# EAGLE board Li_Power_Boost_Converter-Panel-v12B (EAGLE 7.5.0), part 1 of 5
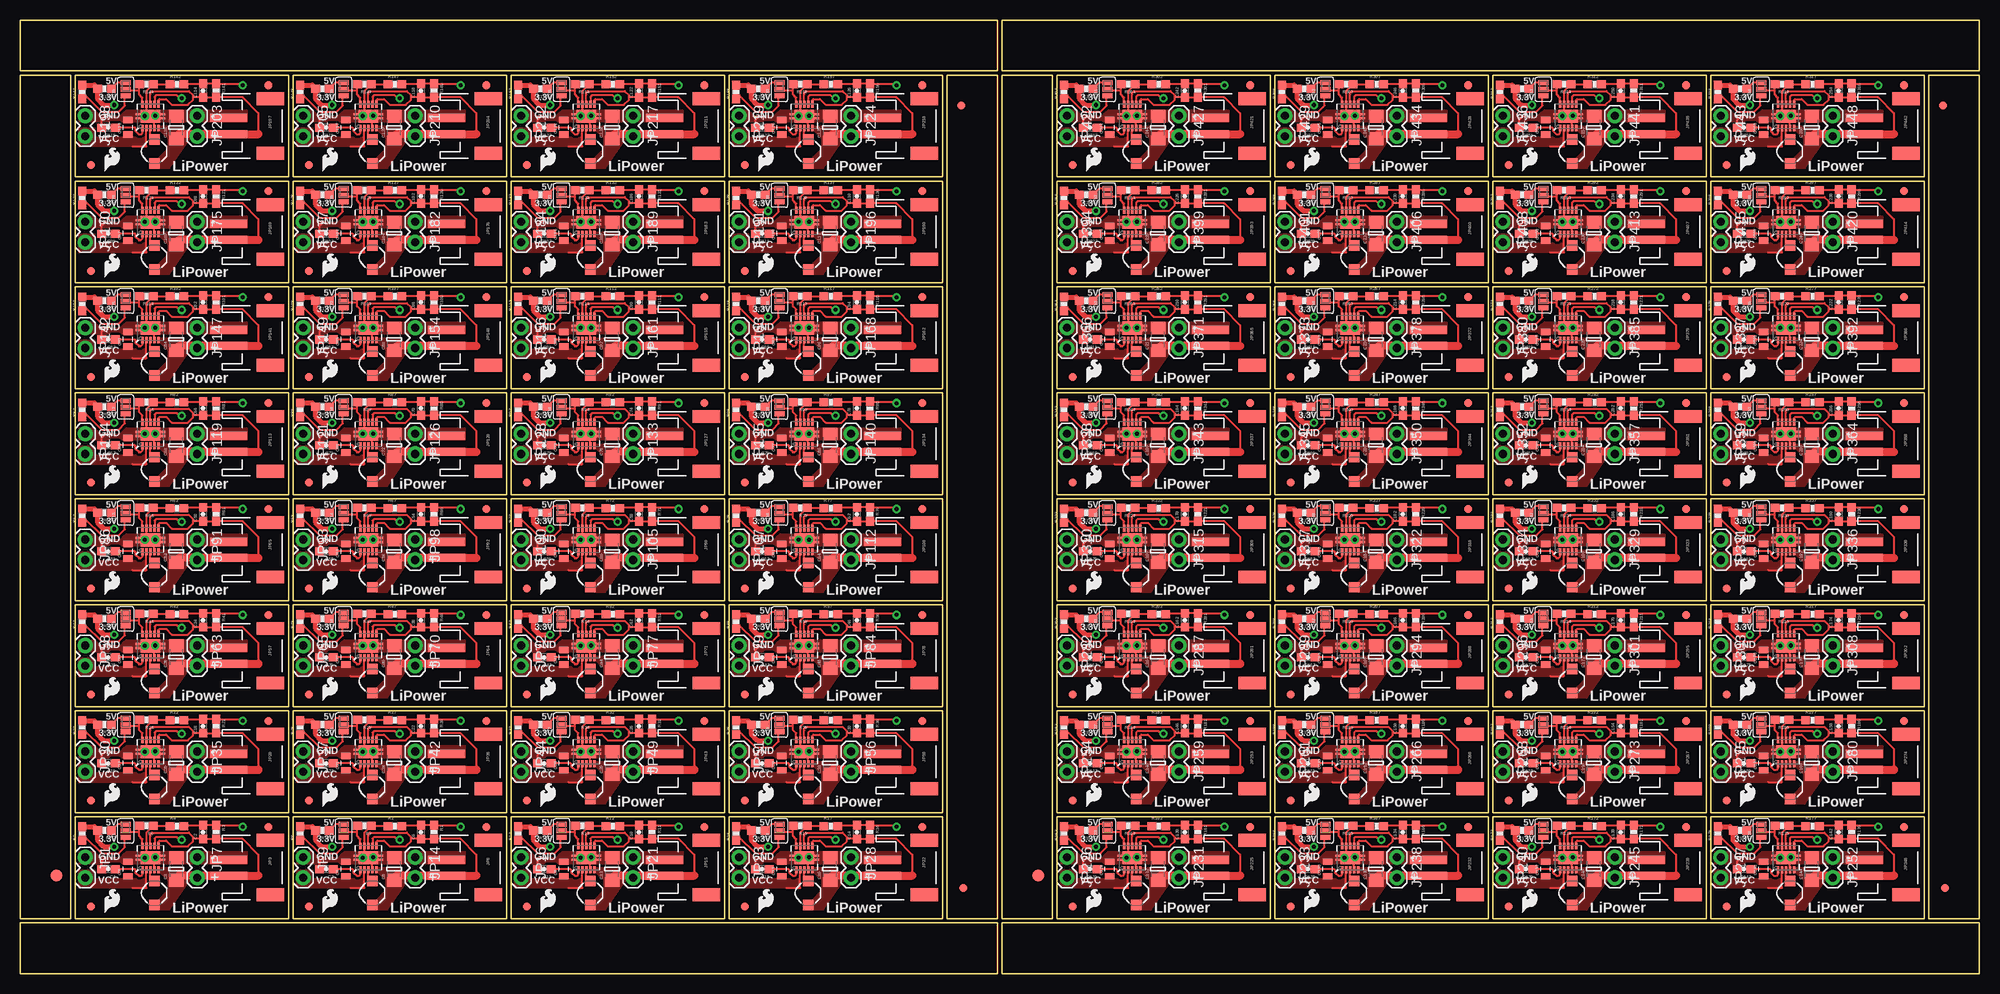
[diagram p0: board, top side]
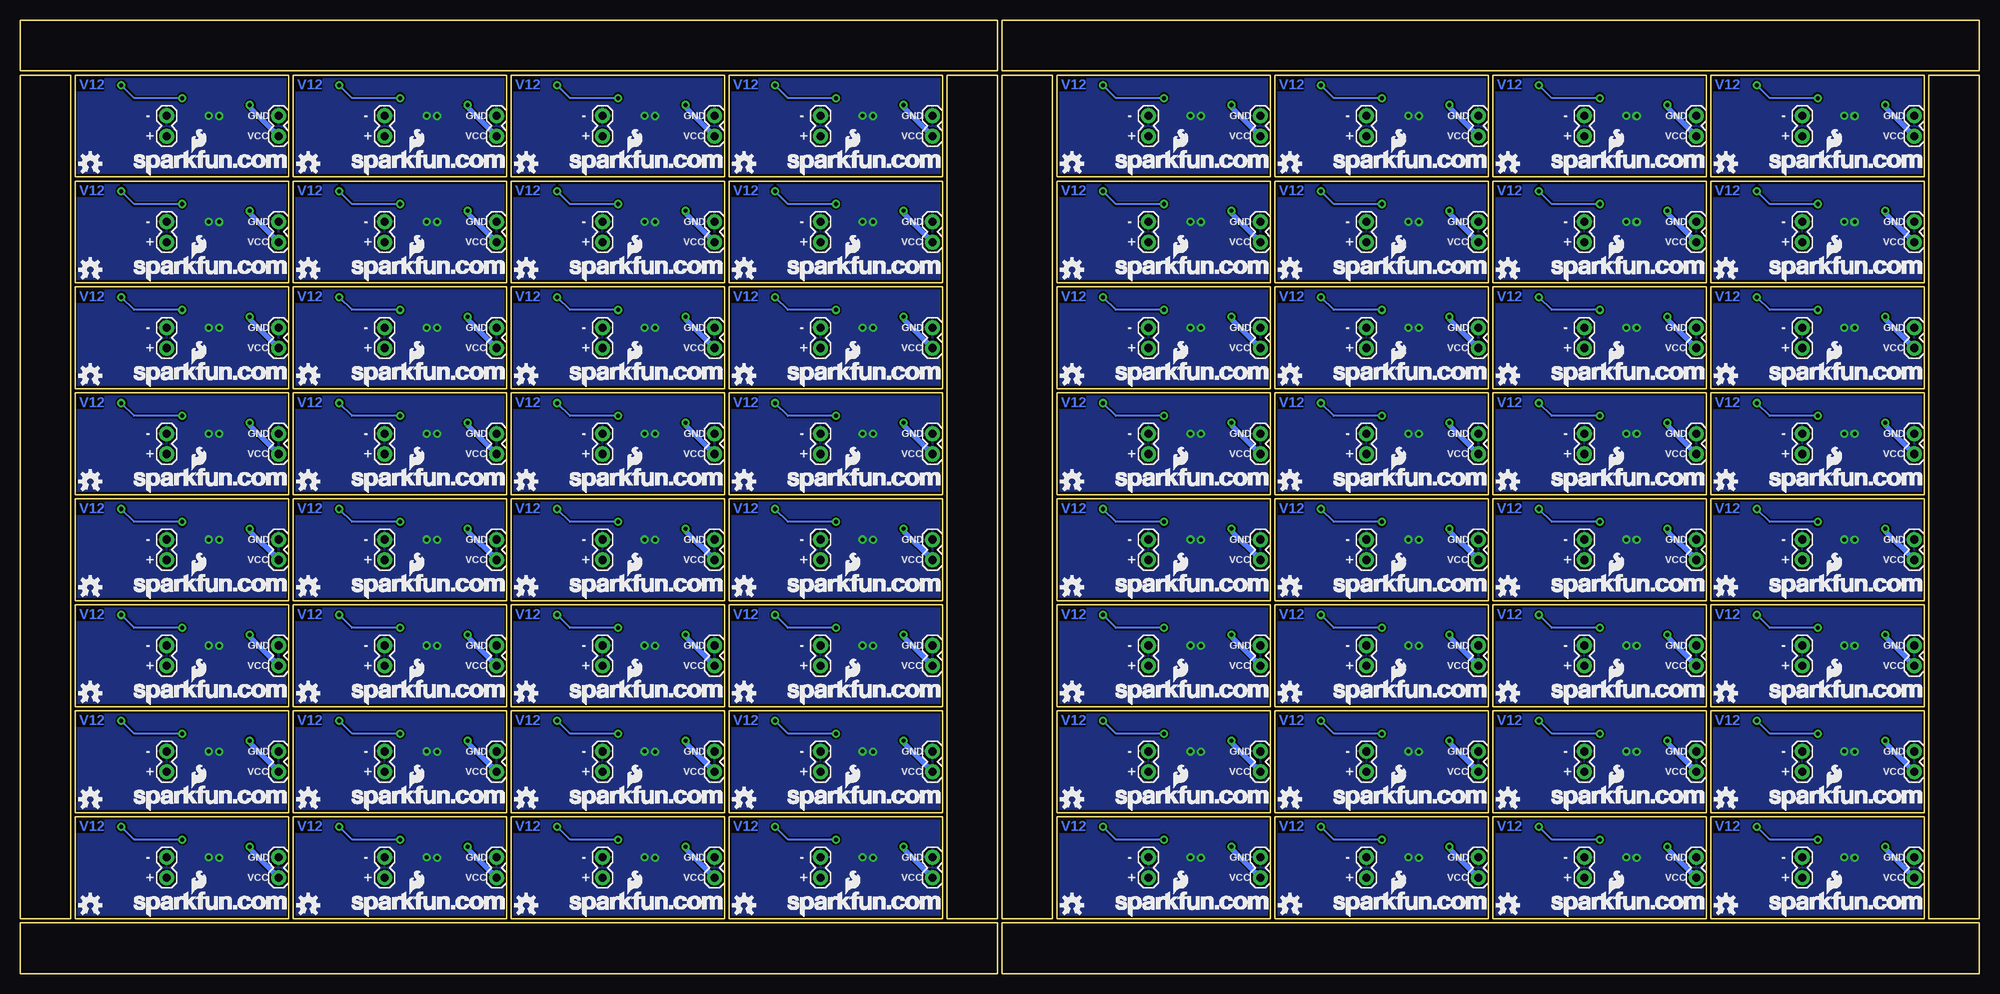
[diagram p1: board, bottom side, seen from below]

Size 244.35 x 118.87 mm. Coordinates in mm from the lower left corner, seen from the top.
Outline: 296 segments
Copper layers (1*16): Top 0.035mm / dielectric 1.5mm / Bottom 0.035mm
Design rules "SparkFun *": minimum track width 8mil, minimum drill 20mil, track to track 8mil, track to pad 8mil, pad to pad 8mil, via to via 8mil, smd to smd 8mil, copper to edge 8mil, drill to drill 8mil, minimum pad ring 12mil, minimum via ring 10mil, stop-mask expansion 4mil, vias tented up to drill 20mil, thermal gap 10mil

## Footprints (pad centres in the part's own frame; a part is rotated, then mirrored left to right if it is on the bottom)
1206 = smd 1.6 x 1.8: 1 -1.4,0; 2 1.4,0
0603-CAP = smd 1.1 x 1: 1 -0.85,0; 2 0.85,0
0805 = smd 0.8 x 1.2: 1 -0.9,0; 2 0.9,0
FIDUCIAL-1.5X3 = smd 1.5 x 1.5: 1 0,0
FIDUCIAL-1X2 = smd 1 x 1: 1 0,0
1X02 = drill 1.016 pad 1.88: 1 0,0; 2 2.54,0
JST-2-SMD = smd 1 x 4.6: 1 -1,-3.7; 2 1,-3.7 | smd 1.6 x 3.4: NC1 -3.4,1.5; NC2 3.4,1.5
CDRH2D09 = smd 1.3 x 1.3: P$1 -1.5,0; P$2 1.5,0
0603-RES = smd 1.1 x 1: 1 -0.85,0; 2 0.85,0
SJ_3_PASTE2&3 = smd 0.635 x 1.27: 1 -0.813,0; 2 0,0; 3 0.813,0
QFN-10_PAD = smd 0.297 x 0.85: 1 -1,-1.475; 2 -0.5,-1.475; 3 0,-1.475; 4 0.5,-1.475; 5 1,-1.475; 6 1,1.475; 7 0.5,1.475; 8 0,1.475; 9 -0.5,1.475; 10 -1,1.475 | smd 0.7 x 0.28: 11 -1.5,0.25; 12 -1.5,-0.25; 13 1.5,0.25; 14 1.5,-0.25 | smd 2.4 x 1.65: 15 0,0

## Placement (x,y rotation side)
C1  10uF  [1206]  19.48,13.03 90 top
C2  0.1uF  [0603-CAP]  22.83,17.63 90 top
C3  22uF  [0805]  13.46,13.03 90 top
C4  0.1uF  [0603-CAP]  11.02,13 180 top
C5  22uF  [0805]  40.64,13.03 90 top
C6  0.1uF  [0603-CAP]  50.01,17.63 90 top
C7  0.1uF  [0603-CAP]  38.2,13 180 top
C8  10uF  [1206]  46.66,13.03 90 top
C9  22uF  [0805]  67.82,13.03 90 top
C10  0.1uF  [0603-CAP]  77.19,17.63 90 top
C11  0.1uF  [0603-CAP]  65.38,13 180 top
C12  10uF  [1206]  73.84,13.03 90 top
C13  22uF  [0805]  95,13.03 90 top
C14  0.1uF  [0603-CAP]  104.37,17.63 90 top
C15  0.1uF  [0603-CAP]  92.56,13 180 top
C16  10uF  [1206]  101.02,13.03 90 top
C17  22uF  [0805]  13.46,26.24 90 top
C18  0.1uF  [0603-CAP]  22.83,30.84 90 top
C19  0.1uF  [0603-CAP]  11.02,26.21 180 top
C20  10uF  [1206]  19.48,26.24 90 top
C21  22uF  [0805]  40.64,26.24 90 top
C22  0.1uF  [0603-CAP]  50.01,30.84 90 top
C23  0.1uF  [0603-CAP]  38.2,26.21 180 top
C24  10uF  [1206]  46.66,26.24 90 top
C25  22uF  [0805]  67.82,26.24 90 top
C26  0.1uF  [0603-CAP]  77.19,30.84 90 top
C27  0.1uF  [0603-CAP]  65.38,26.21 180 top
C28  10uF  [1206]  73.84,26.24 90 top
C29  22uF  [0805]  95,26.24 90 top
C30  0.1uF  [0603-CAP]  104.37,30.84 90 top
C31  0.1uF  [0603-CAP]  92.56,26.21 180 top
C32  10uF  [1206]  101.02,26.24 90 top
C33  22uF  [0805]  13.46,39.45 90 top
C34  0.1uF  [0603-CAP]  22.83,44.04 90 top
C35  0.1uF  [0603-CAP]  11.02,39.42 180 top
C36  10uF  [1206]  19.48,39.45 90 top
C37  22uF  [0805]  40.64,39.45 90 top
C38  0.1uF  [0603-CAP]  50.01,44.04 90 top
C39  0.1uF  [0603-CAP]  38.2,39.42 180 top
C40  10uF  [1206]  46.66,39.45 90 top
C41  22uF  [0805]  67.82,39.45 90 top
C42  0.1uF  [0603-CAP]  77.19,44.04 90 top
C43  0.1uF  [0603-CAP]  65.38,39.42 180 top
C44  10uF  [1206]  73.84,39.45 90 top
C45  22uF  [0805]  95,39.45 90 top
C46  0.1uF  [0603-CAP]  104.37,44.04 90 top
C47  0.1uF  [0603-CAP]  92.56,39.42 180 top
C48  10uF  [1206]  101.02,39.45 90 top
C49  22uF  [0805]  13.46,52.65 90 top
C50  0.1uF  [0603-CAP]  22.83,57.25 90 top
C51  0.1uF  [0603-CAP]  11.02,52.63 180 top
C52  10uF  [1206]  19.48,52.65 90 top
C53  22uF  [0805]  40.64,52.65 90 top
C54  0.1uF  [0603-CAP]  50.01,57.25 90 top
C55  0.1uF  [0603-CAP]  38.2,52.63 180 top
C56  10uF  [1206]  46.66,52.65 90 top
C57  22uF  [0805]  67.82,52.65 90 top
C58  0.1uF  [0603-CAP]  77.19,57.25 90 top
C59  0.1uF  [0603-CAP]  65.38,52.63 180 top
C60  10uF  [1206]  73.84,52.65 90 top
C61  22uF  [0805]  95,52.65 90 top
C62  0.1uF  [0603-CAP]  104.37,57.25 90 top
C63  0.1uF  [0603-CAP]  92.56,52.63 180 top
C64  10uF  [1206]  101.02,52.65 90 top
C65  22uF  [0805]  13.46,65.86 90 top
C66  0.1uF  [0603-CAP]  22.83,70.46 90 top
C67  0.1uF  [0603-CAP]  11.02,65.84 180 top
C68  10uF  [1206]  19.48,65.86 90 top
C69  22uF  [0805]  40.64,65.86 90 top
C70  0.1uF  [0603-CAP]  50.01,70.46 90 top
C71  0.1uF  [0603-CAP]  38.2,65.84 180 top
C72  10uF  [1206]  46.66,65.86 90 top
C73  22uF  [0805]  67.82,65.86 90 top
C74  0.1uF  [0603-CAP]  77.19,70.46 90 top
C75  0.1uF  [0603-CAP]  65.38,65.84 180 top
C76  10uF  [1206]  73.84,65.86 90 top
C77  22uF  [0805]  95,65.86 90 top
C78  0.1uF  [0603-CAP]  104.37,70.46 90 top
C79  0.1uF  [0603-CAP]  92.56,65.84 180 top
C80  10uF  [1206]  101.02,65.86 90 top
C81  22uF  [0805]  13.46,79.07 90 top
C82  0.1uF  [0603-CAP]  22.83,83.67 90 top
C83  0.1uF  [0603-CAP]  11.02,79.04 180 top
C84  10uF  [1206]  19.48,79.07 90 top
C85  22uF  [0805]  40.64,79.07 90 top
C86  0.1uF  [0603-CAP]  50.01,83.67 90 top
C87  0.1uF  [0603-CAP]  38.2,79.04 180 top
C88  10uF  [1206]  46.66,79.07 90 top
C89  22uF  [0805]  67.82,79.07 90 top
C90  0.1uF  [0603-CAP]  77.19,83.67 90 top
C91  0.1uF  [0603-CAP]  65.38,79.04 180 top
C92  10uF  [1206]  73.84,79.07 90 top
C93  22uF  [0805]  95,79.07 90 top
C94  0.1uF  [0603-CAP]  104.37,83.67 90 top
C95  0.1uF  [0603-CAP]  92.56,79.04 180 top
C96  10uF  [1206]  101.02,79.07 90 top
C97  22uF  [0805]  13.46,92.28 90 top
C98  0.1uF  [0603-CAP]  22.83,96.88 90 top
C99  0.1uF  [0603-CAP]  11.02,92.25 180 top
C100  10uF  [1206]  19.48,92.28 90 top
C101  22uF  [0805]  40.64,92.28 90 top
C102  0.1uF  [0603-CAP]  50.01,96.88 90 top
C103  0.1uF  [0603-CAP]  38.2,92.25 180 top
C104  10uF  [1206]  46.66,92.28 90 top
C105  22uF  [0805]  67.82,92.28 90 top
C106  0.1uF  [0603-CAP]  77.19,96.88 90 top
C107  0.1uF  [0603-CAP]  65.38,92.25 180 top
C108  10uF  [1206]  73.84,92.28 90 top
C109  22uF  [0805]  95,92.28 90 top
C110  0.1uF  [0603-CAP]  104.37,96.88 90 top
C111  0.1uF  [0603-CAP]  92.56,92.25 180 top
C112  10uF  [1206]  101.02,92.28 90 top
C113  22uF  [0805]  13.46,105.49 90 top
C114  0.1uF  [0603-CAP]  22.83,110.08 90 top
C115  0.1uF  [0603-CAP]  11.02,105.46 180 top
C116  10uF  [1206]  19.48,105.49 90 top
C117  22uF  [0805]  40.64,105.49 90 top
C118  0.1uF  [0603-CAP]  50.01,110.08 90 top
C119  0.1uF  [0603-CAP]  38.2,105.46 180 top
C120  10uF  [1206]  46.66,105.49 90 top
C121  22uF  [0805]  67.82,105.49 90 top
C122  0.1uF  [0603-CAP]  77.19,110.08 90 top
C123  0.1uF  [0603-CAP]  65.38,105.46 180 top
C124  10uF  [1206]  73.84,105.49 90 top
C125  22uF  [0805]  95,105.49 90 top
C126  0.1uF  [0603-CAP]  104.37,110.08 90 top
C127  0.1uF  [0603-CAP]  92.56,105.46 180 top
C128  10uF  [1206]  101.02,105.49 90 top
C129  22uF  [0805]  135.89,13.03 90 top
C130  0.1uF  [0603-CAP]  145.26,17.63 90 top
C131  0.1uF  [0603-CAP]  133.45,13 180 top
C132  10uF  [1206]  141.91,13.03 90 top
C133  22uF  [0805]  163.07,13.03 90 top
C134  0.1uF  [0603-CAP]  172.44,17.63 90 top
C135  0.1uF  [0603-CAP]  160.63,13 180 top
C136  10uF  [1206]  169.09,13.03 90 top
C137  22uF  [0805]  190.25,13.03 90 top
C138  0.1uF  [0603-CAP]  199.62,17.63 90 top
C139  0.1uF  [0603-CAP]  187.81,13 180 top
C140  10uF  [1206]  196.27,13.03 90 top
C141  22uF  [0805]  217.42,13.03 90 top
C142  0.1uF  [0603-CAP]  226.8,17.63 90 top
C143  0.1uF  [0603-CAP]  214.99,13 180 top
C144  10uF  [1206]  223.44,13.03 90 top
C145  22uF  [0805]  135.89,26.24 90 top
C146  0.1uF  [0603-CAP]  145.26,30.84 90 top
C147  0.1uF  [0603-CAP]  133.45,26.21 180 top
C148  10uF  [1206]  141.91,26.24 90 top
C149  22uF  [0805]  163.07,26.24 90 top
C150  0.1uF  [0603-CAP]  172.44,30.84 90 top
C151  0.1uF  [0603-CAP]  160.63,26.21 180 top
C152  10uF  [1206]  169.09,26.24 90 top
C153  22uF  [0805]  190.25,26.24 90 top
C154  0.1uF  [0603-CAP]  199.62,30.84 90 top
C155  0.1uF  [0603-CAP]  187.81,26.21 180 top
C156  10uF  [1206]  196.27,26.24 90 top
C157  22uF  [0805]  217.42,26.24 90 top
C158  0.1uF  [0603-CAP]  226.8,30.84 90 top
C159  0.1uF  [0603-CAP]  214.99,26.21 180 top
C160  10uF  [1206]  223.44,26.24 90 top
C161  22uF  [0805]  135.89,39.45 90 top
C162  0.1uF  [0603-CAP]  145.26,44.04 90 top
C163  0.1uF  [0603-CAP]  133.45,39.42 180 top
C164  10uF  [1206]  141.91,39.45 90 top
C165  22uF  [0805]  163.07,39.45 90 top
C166  0.1uF  [0603-CAP]  172.44,44.04 90 top
C167  0.1uF  [0603-CAP]  160.63,39.42 180 top
C168  10uF  [1206]  169.09,39.45 90 top
C169  22uF  [0805]  190.25,39.45 90 top
C170  0.1uF  [0603-CAP]  199.62,44.04 90 top
C171  0.1uF  [0603-CAP]  187.81,39.42 180 top
C172  10uF  [1206]  196.27,39.45 90 top
C173  22uF  [0805]  217.42,39.45 90 top
C174  0.1uF  [0603-CAP]  226.8,44.04 90 top
C175  0.1uF  [0603-CAP]  214.99,39.42 180 top
C176  10uF  [1206]  223.44,39.45 90 top
C177  22uF  [0805]  135.89,52.65 90 top
C178  0.1uF  [0603-CAP]  145.26,57.25 90 top
C179  0.1uF  [0603-CAP]  133.45,52.63 180 top
C180  10uF  [1206]  141.91,52.65 90 top
C181  22uF  [0805]  163.07,52.65 90 top
C182  0.1uF  [0603-CAP]  172.44,57.25 90 top
C183  0.1uF  [0603-CAP]  160.63,52.63 180 top
C184  10uF  [1206]  169.09,52.65 90 top
C185  22uF  [0805]  190.25,52.65 90 top
C186  0.1uF  [0603-CAP]  199.62,57.25 90 top
C187  0.1uF  [0603-CAP]  187.81,52.63 180 top
C188  10uF  [1206]  196.27,52.65 90 top
C189  22uF  [0805]  217.42,52.65 90 top
C190  0.1uF  [0603-CAP]  226.8,57.25 90 top
C191  0.1uF  [0603-CAP]  214.99,52.63 180 top
C192  10uF  [1206]  223.44,52.65 90 top
C193  22uF  [0805]  135.89,65.86 90 top
C194  0.1uF  [0603-CAP]  145.26,70.46 90 top
C195  0.1uF  [0603-CAP]  133.45,65.84 180 top
C196  10uF  [1206]  141.91,65.86 90 top
C197  22uF  [0805]  163.07,65.86 90 top
C198  0.1uF  [0603-CAP]  172.44,70.46 90 top
C199  0.1uF  [0603-CAP]  160.63,65.84 180 top
C200  10uF  [1206]  169.09,65.86 90 top
C201  22uF  [0805]  190.25,65.86 90 top
C202  0.1uF  [0603-CAP]  199.62,70.46 90 top
C203  0.1uF  [0603-CAP]  187.81,65.84 180 top
C204  10uF  [1206]  196.27,65.86 90 top
C205  22uF  [0805]  217.42,65.86 90 top
C206  0.1uF  [0603-CAP]  226.8,70.46 90 top
C207  0.1uF  [0603-CAP]  214.99,65.84 180 top
C208  10uF  [1206]  223.44,65.86 90 top
C209  22uF  [0805]  135.89,79.07 90 top
C210  0.1uF  [0603-CAP]  145.26,83.67 90 top
C211  0.1uF  [0603-CAP]  133.45,79.04 180 top
C212  10uF  [1206]  141.91,79.07 90 top
C213  22uF  [0805]  163.07,79.07 90 top
C214  0.1uF  [0603-CAP]  172.44,83.67 90 top
C215  0.1uF  [0603-CAP]  160.63,79.04 180 top
C216  10uF  [1206]  169.09,79.07 90 top
C217  22uF  [0805]  190.25,79.07 90 top
C218  0.1uF  [0603-CAP]  199.62,83.67 90 top
C219  0.1uF  [0603-CAP]  187.81,79.04 180 top
C220  10uF  [1206]  196.27,79.07 90 top
C221  22uF  [0805]  217.42,79.07 90 top
C222  0.1uF  [0603-CAP]  226.8,83.67 90 top
C223  0.1uF  [0603-CAP]  214.99,79.04 180 top
C224  10uF  [1206]  223.44,79.07 90 top
C225  22uF  [0805]  135.89,92.28 90 top
C226  0.1uF  [0603-CAP]  145.26,96.88 90 top
C227  0.1uF  [0603-CAP]  133.45,92.25 180 top
C228  10uF  [1206]  141.91,92.28 90 top
C229  22uF  [0805]  163.07,92.28 90 top
C230  0.1uF  [0603-CAP]  172.44,96.88 90 top
C231  0.1uF  [0603-CAP]  160.63,92.25 180 top
C232  10uF  [1206]  169.09,92.28 90 top
C233  22uF  [0805]  190.25,92.28 90 top
C234  0.1uF  [0603-CAP]  199.62,96.88 90 top
C235  0.1uF  [0603-CAP]  187.81,92.25 180 top
C236  10uF  [1206]  196.27,92.28 90 top
C237  22uF  [0805]  217.42,92.28 90 top
C238  0.1uF  [0603-CAP]  226.8,96.88 90 top
C239  0.1uF  [0603-CAP]  214.99,92.25 180 top
C240  10uF  [1206]  223.44,92.28 90 top
C241  22uF  [0805]  135.89,105.49 90 top
C242  0.1uF  [0603-CAP]  145.26,110.08 90 top
C243  0.1uF  [0603-CAP]  133.45,105.46 180 top
C244  10uF  [1206]  141.91,105.49 90 top
C245  22uF  [0805]  163.07,105.49 90 top
C246  0.1uF  [0603-CAP]  172.44,110.08 90 top
C247  0.1uF  [0603-CAP]  160.63,105.46 180 top
C248  10uF  [1206]  169.09,105.49 90 top
C249  22uF  [0805]  190.25,105.49 90 top
C250  0.1uF  [0603-CAP]  199.62,110.08 90 top
C251  0.1uF  [0603-CAP]  187.81,105.46 180 top
C252  10uF  [1206]  196.27,105.49 90 top
C253  22uF  [0805]  217.42,105.49 90 top
C254  0.1uF  [0603-CAP]  226.8,110.08 90 top
C255  0.1uF  [0603-CAP]  214.99,105.46 180 top
C256  10uF  [1206]  223.44,105.49 90 top
E$1  [FIDUCIAL-1.5X3]  4.57,12.19 0 top
E$2  [FIDUCIAL-1X2]  240.03,10.67 0 top
E$3  [FIDUCIAL-1X2]  239.78,108.2 180 top
E$4  [FIDUCIAL-1X2]  117.6,10.67 0 top
E$5  [FIDUCIAL-1X2]  117.35,108.2 180 top
E$6  [FIDUCIAL-1.5X3]  127,12.19 0 top
JP1  VOUT  [1X02]  8.13,14.48 270 top
JP2  LOGO-SFESK  [SFE-LOGO-FLAME]  10.57,7.65 0 top
JP3  JST  [JST-2-SMD]  29.72,13.21 270 top
JP4  FIDUCIAL1X2  [FIDUCIAL-1X2]  8.86,8.36 0 top
JP5  FIDUCIAL1X2  [FIDUCIAL-1X2]  30.99,18.29 0 top
JP6  LOGO-SFENEW  [SFE-NEW-WEBLOGO]  26.22,7.07 0 bottom
JP7  VIN  [1X02]  22.1,14.48 270 top
JP8  JST  [JST-2-SMD]  56.9,13.21 270 top
JP9  VOUT  [1X02]  35.31,14.48 270 top
JP10  LOGO-SFESK  [SFE-LOGO-FLAME]  37.74,7.65 0 top
JP11  FIDUCIAL1X2  [FIDUCIAL-1X2]  36.04,8.36 0 top
JP12  FIDUCIAL1X2  [FIDUCIAL-1X2]  58.17,18.29 0 top
JP13  LOGO-SFENEW  [SFE-NEW-WEBLOGO]  53.4,7.07 0 bottom
JP14  VIN  [1X02]  49.28,14.48 270 top
JP15  JST  [JST-2-SMD]  84.07,13.21 270 top
JP16  VOUT  [1X02]  62.48,14.48 270 top
JP17  LOGO-SFESK  [SFE-LOGO-FLAME]  64.92,7.65 0 top
JP18  FIDUCIAL1X2  [FIDUCIAL-1X2]  63.22,8.36 0 top
JP19  FIDUCIAL1X2  [FIDUCIAL-1X2]  85.34,18.29 0 top
JP20  LOGO-SFENEW  [SFE-NEW-WEBLOGO]  80.57,7.07 0 bottom
JP21  VIN  [1X02]  76.45,14.48 270 top
JP22  JST  [JST-2-SMD]  111.25,13.21 270 top
JP23  VOUT  [1X02]  89.66,14.48 270 top
JP24  LOGO-SFESK  [SFE-LOGO-FLAME]  92.1,7.65 0 top
JP25  FIDUCIAL1X2  [FIDUCIAL-1X2]  90.4,8.36 0 top
JP26  FIDUCIAL1X2  [FIDUCIAL-1X2]  112.52,18.29 0 top
JP27  LOGO-SFENEW  [SFE-NEW-WEBLOGO]  107.75,7.07 0 bottom
JP28  VIN  [1X02]  103.63,14.48 270 top
JP29  JST  [JST-2-SMD]  29.72,26.42 270 top
JP30  VOUT  [1X02]  8.13,27.69 270 top
JP31  LOGO-SFESK  [SFE-LOGO-FLAME]  10.57,20.85 0 top
JP32  FIDUCIAL1X2  [FIDUCIAL-1X2]  8.86,21.56 0 top
JP33  FIDUCIAL1X2  [FIDUCIAL-1X2]  30.99,31.5 0 top
JP34  LOGO-SFENEW  [SFE-NEW-WEBLOGO]  26.22,20.28 0 bottom
JP35  VIN  [1X02]  22.1,27.69 270 top
JP36  JST  [JST-2-SMD]  56.9,26.42 270 top
JP37  VOUT  [1X02]  35.31,27.69 270 top
JP38  LOGO-SFESK  [SFE-LOGO-FLAME]  37.74,20.85 0 top
JP39  FIDUCIAL1X2  [FIDUCIAL-1X2]  36.04,21.56 0 top
JP40  FIDUCIAL1X2  [FIDUCIAL-1X2]  58.17,31.5 0 top
JP41  LOGO-SFENEW  [SFE-NEW-WEBLOGO]  53.4,20.28 0 bottom
JP42  VIN  [1X02]  49.28,27.69 270 top
JP43  JST  [JST-2-SMD]  84.07,26.42 270 top
JP44  VOUT  [1X02]  62.48,27.69 270 top
JP45  LOGO-SFESK  [SFE-LOGO-FLAME]  64.92,20.85 0 top
JP46  FIDUCIAL1X2  [FIDUCIAL-1X2]  63.22,21.56 0 top
JP47  FIDUCIAL1X2  [FIDUCIAL-1X2]  85.34,31.5 0 top
JP48  LOGO-SFENEW  [SFE-NEW-WEBLOGO]  80.57,20.28 0 bottom
JP49  VIN  [1X02]  76.45,27.69 270 top
JP50  JST  [JST-2-SMD]  111.25,26.42 270 top
JP51  VOUT  [1X02]  89.66,27.69 270 top
JP52  LOGO-SFESK  [SFE-LOGO-FLAME]  92.1,20.85 0 top
JP53  FIDUCIAL1X2  [FIDUCIAL-1X2]  90.4,21.56 0 top
JP54  FIDUCIAL1X2  [FIDUCIAL-1X2]  112.52,31.5 0 top
JP55  LOGO-SFENEW  [SFE-NEW-WEBLOGO]  107.75,20.28 0 bottom
JP56  VIN  [1X02]  103.63,27.69 270 top
JP57  JST  [JST-2-SMD]  29.72,39.62 270 top
JP58  VOUT  [1X02]  8.13,40.89 270 top
JP59  LOGO-SFESK  [SFE-LOGO-FLAME]  10.57,34.06 0 top
JP60  FIDUCIAL1X2  [FIDUCIAL-1X2]  8.86,34.77 0 top
JP61  FIDUCIAL1X2  [FIDUCIAL-1X2]  30.99,44.7 0 top
JP62  LOGO-SFENEW  [SFE-NEW-WEBLOGO]  26.22,33.48 0 bottom
JP63  VIN  [1X02]  22.1,40.89 270 top
JP64  JST  [JST-2-SMD]  56.9,39.62 270 top
JP65  VOUT  [1X02]  35.31,40.89 270 top
JP66  LOGO-SFESK  [SFE-LOGO-FLAME]  37.74,34.06 0 top
JP67  FIDUCIAL1X2  [FIDUCIAL-1X2]  36.04,34.77 0 top
JP68  FIDUCIAL1X2  [FIDUCIAL-1X2]  58.17,44.7 0 top
JP69  LOGO-SFENEW  [SFE-NEW-WEBLOGO]  53.4,33.48 0 bottom
JP70  VIN  [1X02]  49.28,40.89 270 top
JP71  JST  [JST-2-SMD]  84.07,39.62 270 top
JP72  VOUT  [1X02]  62.48,40.89 270 top
JP73  LOGO-SFESK  [SFE-LOGO-FLAME]  64.92,34.06 0 top
JP74  FIDUCIAL1X2  [FIDUCIAL-1X2]  63.22,34.77 0 top
JP75  FIDUCIAL1X2  [FIDUCIAL-1X2]  85.34,44.7 0 top
JP76  LOGO-SFENEW  [SFE-NEW-WEBLOGO]  80.57,33.48 0 bottom
JP77  VIN  [1X02]  76.45,40.89 270 top
JP78  JST  [JST-2-SMD]  111.25,39.62 270 top
JP79  VOUT  [1X02]  89.66,40.89 270 top
JP80  LOGO-SFESK  [SFE-LOGO-FLAME]  92.1,34.06 0 top
JP81  FIDUCIAL1X2  [FIDUCIAL-1X2]  90.4,34.77 0 top
JP82  FIDUCIAL1X2  [FIDUCIAL-1X2]  112.52,44.7 0 top
JP83  LOGO-SFENEW  [SFE-NEW-WEBLOGO]  107.75,33.48 0 bottom
JP84  VIN  [1X02]  103.63,40.89 270 top
JP85  JST  [JST-2-SMD]  29.72,52.83 270 top
JP86  VOUT  [1X02]  8.13,54.1 270 top
JP87  LOGO-SFESK  [SFE-LOGO-FLAME]  10.57,47.27 0 top
JP88  FIDUCIAL1X2  [FIDUCIAL-1X2]  8.86,47.98 0 top
JP89  FIDUCIAL1X2  [FIDUCIAL-1X2]  30.99,57.91 0 top
JP90  LOGO-SFENEW  [SFE-NEW-WEBLOGO]  26.22,46.69 0 bottom
JP91  VIN  [1X02]  22.1,54.1 270 top
JP92  JST  [JST-2-SMD]  56.9,52.83 270 top
JP93  VOUT  [1X02]  35.31,54.1 270 top
JP94  LOGO-SFESK  [SFE-LOGO-FLAME]  37.74,47.27 0 top
JP95  FIDUCIAL1X2  [FIDUCIAL-1X2]  36.04,47.98 0 top
JP96  FIDUCIAL1X2  [FIDUCIAL-1X2]  58.17,57.91 0 top
JP97  LOGO-SFENEW  [SFE-NEW-WEBLOGO]  53.4,46.69 0 bottom
JP98  VIN  [1X02]  49.28,54.1 270 top
JP99  JST  [JST-2-SMD]  84.07,52.83 270 top
JP100  VOUT  [1X02]  62.48,54.1 270 top
JP101  LOGO-SFESK  [SFE-LOGO-FLAME]  64.92,47.27 0 top
JP102  FIDUCIAL1X2  [FIDUCIAL-1X2]  63.22,47.98 0 top
JP103  FIDUCIAL1X2  [FIDUCIAL-1X2]  85.34,57.91 0 top
JP104  LOGO-SFENEW  [SFE-NEW-WEBLOGO]  80.57,46.69 0 bottom
JP105  VIN  [1X02]  76.45,54.1 270 top
JP106  JST  [JST-2-SMD]  111.25,52.83 270 top
JP107  VOUT  [1X02]  89.66,54.1 270 top
JP108  LOGO-SFESK  [SFE-LOGO-FLAME]  92.1,47.27 0 top
JP109  FIDUCIAL1X2  [FIDUCIAL-1X2]  90.4,47.98 0 top
JP110  FIDUCIAL1X2  [FIDUCIAL-1X2]  112.52,57.91 0 top
JP111  LOGO-SFENEW  [SFE-NEW-WEBLOGO]  107.75,46.69 0 bottom
JP112  VIN  [1X02]  103.63,54.1 270 top
JP113  JST  [JST-2-SMD]  29.72,66.04 270 top
JP114  VOUT  [1X02]  8.13,67.31 270 top
JP115  LOGO-SFESK  [SFE-LOGO-FLAME]  10.57,60.48 0 top
JP116  FIDUCIAL1X2  [FIDUCIAL-1X2]  8.86,61.19 0 top
JP117  FIDUCIAL1X2  [FIDUCIAL-1X2]  30.99,71.12 0 top
JP118  LOGO-SFENEW  [SFE-NEW-WEBLOGO]  26.22,59.9 0 bottom
JP119  VIN  [1X02]  22.1,67.31 270 top
JP120  JST  [JST-2-SMD]  56.9,66.04 270 top
JP121  VOUT  [1X02]  35.31,67.31 270 top
JP122  LOGO-SFESK  [SFE-LOGO-FLAME]  37.74,60.48 0 top
JP123  FIDUCIAL1X2  [FIDUCIAL-1X2]  36.04,61.19 0 top
JP124  FIDUCIAL1X2  [FIDUCIAL-1X2]  58.17,71.12 0 top
JP125  LOGO-SFENEW  [SFE-NEW-WEBLOGO]  53.4,59.9 0 bottom
JP126  VIN  [1X02]  49.28,67.31 270 top
JP127  JST  [JST-2-SMD]  84.07,66.04 270 top
JP128  VOUT  [1X02]  62.48,67.31 270 top
JP129  LOGO-SFESK  [SFE-LOGO-FLAME]  64.92,60.48 0 top
JP130  FIDUCIAL1X2  [FIDUCIAL-1X2]  63.22,61.19 0 top
JP131  FIDUCIAL1X2  [FIDUCIAL-1X2]  85.34,71.12 0 top
JP132  LOGO-SFENEW  [SFE-NEW-WEBLOGO]  80.57,59.9 0 bottom
JP133  VIN  [1X02]  76.45,67.31 270 top
JP134  JST  [JST-2-SMD]  111.25,66.04 270 top
JP135  VOUT  [1X02]  89.66,67.31 270 top
JP136  LOGO-SFESK  [SFE-LOGO-FLAME]  92.1,60.48 0 top
JP137  FIDUCIAL1X2  [FIDUCIAL-1X2]  90.4,61.19 0 top
JP138  FIDUCIAL1X2  [FIDUCIAL-1X2]  112.52,71.12 0 top
JP139  LOGO-SFENEW  [SFE-NEW-WEBLOGO]  107.75,59.9 0 bottom
JP140  VIN  [1X02]  103.63,67.31 270 top
JP141  JST  [JST-2-SMD]  29.72,79.25 270 top
JP142  VOUT  [1X02]  8.13,80.52 270 top
JP143  LOGO-SFESK  [SFE-LOGO-FLAME]  10.57,73.69 0 top
JP144  FIDUCIAL1X2  [FIDUCIAL-1X2]  8.86,74.4 0 top
JP145  FIDUCIAL1X2  [FIDUCIAL-1X2]  30.99,84.33 0 top
JP146  LOGO-SFENEW  [SFE-NEW-WEBLOGO]  26.22,73.11 0 bottom
JP147  VIN  [1X02]  22.1,80.52 270 top
JP148  JST  [JST-2-SMD]  56.9,79.25 270 top
JP149  VOUT  [1X02]  35.31,80.52 270 top
JP150  LOGO-SFESK  [SFE-LOGO-FLAME]  37.74,73.69 0 top
JP151  FIDUCIAL1X2  [FIDUCIAL-1X2]  36.04,74.4 0 top
JP152  FIDUCIAL1X2  [FIDUCIAL-1X2]  58.17,84.33 0 top
JP153  LOGO-SFENEW  [SFE-NEW-WEBLOGO]  53.4,73.11 0 bottom
JP154  VIN  [1X02]  49.28,80.52 270 top
JP155  JST  [JST-2-SMD]  84.07,79.25 270 top
JP156  VOUT  [1X02]  62.48,80.52 270 top
JP157  LOGO-SFESK  [SFE-LOGO-FLAME]  64.92,73.69 0 top
JP158  FIDUCIAL1X2  [FIDUCIAL-1X2]  63.22,74.4 0 top
JP159  FIDUCIAL1X2  [FIDUCIAL-1X2]  85.34,84.33 0 top
JP160  LOGO-SFENEW  [SFE-NEW-WEBLOGO]  80.57,73.11 0 bottom
JP161  VIN  [1X02]  76.45,80.52 270 top
JP162  JST  [JST-2-SMD]  111.25,79.25 270 top
JP163  VOUT  [1X02]  89.66,80.52 270 top
JP164  LOGO-SFESK  [SFE-LOGO-FLAME]  92.1,73.69 0 top
JP165  FIDUCIAL1X2  [FIDUCIAL-1X2]  90.4,74.4 0 top
JP166  FIDUCIAL1X2  [FIDUCIAL-1X2]  112.52,84.33 0 top
JP167  LOGO-SFENEW  [SFE-NEW-WEBLOGO]  107.75,73.11 0 bottom
JP168  VIN  [1X02]  103.63,80.52 270 top
JP169  JST  [JST-2-SMD]  29.72,92.46 270 top
JP170  VOUT  [1X02]  8.13,93.73 270 top
JP171  LOGO-SFESK  [SFE-LOGO-FLAME]  10.57,86.89 0 top
JP172  FIDUCIAL1X2  [FIDUCIAL-1X2]  8.86,87.6 0 top
JP173  FIDUCIAL1X2  [FIDUCIAL-1X2]  30.99,97.54 0 top
JP174  LOGO-SFENEW  [SFE-NEW-WEBLOGO]  26.22,86.32 0 bottom
JP175  VIN  [1X02]  22.1,93.73 270 top
JP176  JST  [JST-2-SMD]  56.9,92.46 270 top
JP177  VOUT  [1X02]  35.31,93.73 270 top
JP178  LOGO-SFESK  [SFE-LOGO-FLAME]  37.74,86.89 0 top
JP179  FIDUCIAL1X2  [FIDUCIAL-1X2]  36.04,87.6 0 top
JP180  FIDUCIAL1X2  [FIDUCIAL-1X2]  58.17,97.54 0 top
JP181  LOGO-SFENEW  [SFE-NEW-WEBLOGO]  53.4,86.32 0 bottom
JP182  VIN  [1X02]  49.28,93.73 270 top
JP183  JST  [JST-2-SMD]  84.07,92.46 270 top
JP184  VOUT  [1X02]  62.48,93.73 270 top
JP185  LOGO-SFESK  [SFE-LOGO-FLAME]  64.92,86.89 0 top
JP186  FIDUCIAL1X2  [FIDUCIAL-1X2]  63.22,87.6 0 top
JP187  FIDUCIAL1X2  [FIDUCIAL-1X2]  85.34,97.54 0 top
JP188  LOGO-SFENEW  [SFE-NEW-WEBLOGO]  80.57,86.32 0 bottom
JP189  VIN  [1X02]  76.45,93.73 270 top
JP190  JST  [JST-2-SMD]  111.25,92.46 270 top
JP191  VOUT  [1X02]  89.66,93.73 270 top
JP192  LOGO-SFESK  [SFE-LOGO-FLAME]  92.1,86.89 0 top
JP193  FIDUCIAL1X2  [FIDUCIAL-1X2]  90.4,87.6 0 top
JP194  FIDUCIAL1X2  [FIDUCIAL-1X2]  112.52,97.54 0 top
JP195  LOGO-SFENEW  [SFE-NEW-WEBLOGO]  107.75,86.32 0 bottom
JP196  VIN  [1X02]  103.63,93.73 270 top
JP197  JST  [JST-2-SMD]  29.72,105.66 270 top
JP198  VOUT  [1X02]  8.13,106.93 270 top
JP199  LOGO-SFESK  [SFE-LOGO-FLAME]  10.57,100.1 0 top
JP200  FIDUCIAL1X2  [FIDUCIAL-1X2]  8.86,100.81 0 top
JP201  FIDUCIAL1X2  [FIDUCIAL-1X2]  30.99,110.74 0 top
JP202  LOGO-SFENEW  [SFE-NEW-WEBLOGO]  26.22,99.52 0 bottom
JP203  VIN  [1X02]  22.1,106.93 270 top
JP204  JST  [JST-2-SMD]  56.9,105.66 270 top
JP205  VOUT  [1X02]  35.31,106.93 270 top
JP206  LOGO-SFESK  [SFE-LOGO-FLAME]  37.74,100.1 0 top
JP207  FIDUCIAL1X2  [FIDUCIAL-1X2]  36.04,100.81 0 top
JP208  FIDUCIAL1X2  [FIDUCIAL-1X2]  58.17,110.74 0 top
JP209  LOGO-SFENEW  [SFE-NEW-WEBLOGO]  53.4,99.52 0 bottom
JP210  VIN  [1X02]  49.28,106.93 270 top
JP211  JST  [JST-2-SMD]  84.07,105.66 270 top
JP212  VOUT  [1X02]  62.48,106.93 270 top
JP213  LOGO-SFESK  [SFE-LOGO-FLAME]  64.92,100.1 0 top
JP214  FIDUCIAL1X2  [FIDUCIAL-1X2]  63.22,100.81 0 top
JP215  FIDUCIAL1X2  [FIDUCIAL-1X2]  85.34,110.74 0 top
JP216  LOGO-SFENEW  [SFE-NEW-WEBLOGO]  80.57,99.52 0 bottom
JP217  VIN  [1X02]  76.45,106.93 270 top
JP218  JST  [JST-2-SMD]  111.25,105.66 270 top
JP219  VOUT  [1X02]  89.66,106.93 270 top
JP220  LOGO-SFESK  [SFE-LOGO-FLAME]  92.1,100.1 0 top
JP221  FIDUCIAL1X2  [FIDUCIAL-1X2]  90.4,100.81 0 top
JP222  FIDUCIAL1X2  [FIDUCIAL-1X2]  112.52,110.74 0 top
JP223  LOGO-SFENEW  [SFE-NEW-WEBLOGO]  107.75,99.52 0 bottom
JP224  VIN  [1X02]  103.63,106.93 270 top
JP225  JST  [JST-2-SMD]  152.15,13.21 270 top
JP226  VOUT  [1X02]  130.56,14.48 270 top
JP227  LOGO-SFESK  [SFE-LOGO-FLAME]  132.99,7.65 0 top
JP228  FIDUCIAL1X2  [FIDUCIAL-1X2]  131.29,8.36 0 top
JP229  FIDUCIAL1X2  [FIDUCIAL-1X2]  153.42,18.29 0 top
JP230  LOGO-SFENEW  [SFE-NEW-WEBLOGO]  148.65,7.07 0 bottom
JP231  VIN  [1X02]  144.53,14.48 270 top
JP232  JST  [JST-2-SMD]  179.32,13.21 270 top
JP233  VOUT  [1X02]  157.73,14.48 270 top
JP234  LOGO-SFESK  [SFE-LOGO-FLAME]  160.17,7.65 0 top
JP235  FIDUCIAL1X2  [FIDUCIAL-1X2]  158.47,8.36 0 top
JP236  FIDUCIAL1X2  [FIDUCIAL-1X2]  180.59,18.29 0 top
JP237  LOGO-SFENEW  [SFE-NEW-WEBLOGO]  175.82,7.07 0 bottom
JP238  VIN  [1X02]  171.7,14.48 270 top
JP239  JST  [JST-2-SMD]  206.5,13.21 270 top
JP240  VOUT  [1X02]  184.91,14.48 270 top
JP241  LOGO-SFESK  [SFE-LOGO-FLAME]  187.35,7.65 0 top
JP242  FIDUCIAL1X2  [FIDUCIAL-1X2]  185.65,8.36 0 top
JP243  FIDUCIAL1X2  [FIDUCIAL-1X2]  207.77,18.29 0 top
JP244  LOGO-SFENEW  [SFE-NEW-WEBLOGO]  203,7.07 0 bottom
JP245  VIN  [1X02]  198.88,14.48 270 top
JP246  JST  [JST-2-SMD]  233.68,13.21 270 top
JP247  VOUT  [1X02]  212.09,14.48 270 top
JP248  LOGO-SFESK  [SFE-LOGO-FLAME]  214.53,7.65 0 top
JP249  FIDUCIAL1X2  [FIDUCIAL-1X2]  212.83,8.36 0 top
JP250  FIDUCIAL1X2  [FIDUCIAL-1X2]  234.95,18.29 0 top
JP251  LOGO-SFENEW  [SFE-NEW-WEBLOGO]  230.18,7.07 0 bottom
JP252  VIN  [1X02]  226.06,14.48 270 top
JP253  JST  [JST-2-SMD]  152.15,26.42 270 top
JP254  VOUT  [1X02]  130.56,27.69 270 top
JP255  LOGO-SFESK  [SFE-LOGO-FLAME]  132.99,20.85 0 top
JP256  FIDUCIAL1X2  [FIDUCIAL-1X2]  131.29,21.56 0 top
JP257  FIDUCIAL1X2  [FIDUCIAL-1X2]  153.42,31.5 0 top
JP258  LOGO-SFENEW  [SFE-NEW-WEBLOGO]  148.65,20.28 0 bottom
JP259  VIN  [1X02]  144.53,27.69 270 top
JP260  JST  [JST-2-SMD]  179.32,26.42 270 top
JP261  VOUT  [1X02]  157.73,27.69 270 top
JP262  LOGO-SFESK  [SFE-LOGO-FLAME]  160.17,20.85 0 top
JP263  FIDUCIAL1X2  [FIDUCIAL-1X2]  158.47,21.56 0 top
JP264  FIDUCIAL1X2  [FIDUCIAL-1X2]  180.59,31.5 0 top
JP265  LOGO-SFENEW  [SFE-NEW-WEBLOGO]  175.82,20.28 0 bottom
JP266  VIN  [1X02]  171.7,27.69 270 top
JP267  JST  [JST-2-SMD]  206.5,26.42 270 top
JP268  VOUT  [1X02]  184.91,27.69 270 top
JP269  LOGO-SFESK  [SFE-LOGO-FLAME]  187.35,20.85 0 top
JP270  FIDUCIAL1X2  [FIDUCIAL-1X2]  185.65,21.56 0 top
JP271  FIDUCIAL1X2  [FIDUCIAL-1X2]  207.77,31.5 0 top
JP272  LOGO-SFENEW  [SFE-NEW-WEBLOGO]  203,20.28 0 bottom
JP273  VIN  [1X02]  198.88,27.69 270 top
JP274  JST  [JST-2-SMD]  233.68,26.42 270 top
JP275  VOUT  [1X02]  212.09,27.69 270 top
JP276  LOGO-SFESK  [SFE-LOGO-FLAME]  214.53,20.85 0 top
JP277  FIDUCIAL1X2  [FIDUCIAL-1X2]  212.83,21.56 0 top
JP278  FIDUCIAL1X2  [FIDUCIAL-1X2]  234.95,31.5 0 top
JP279  LOGO-SFENEW  [SFE-NEW-WEBLOGO]  230.18,20.28 0 bottom
JP280  VIN  [1X02]  226.06,27.69 270 top
JP281  JST  [JST-2-SMD]  152.15,39.62 270 top
JP282  VOUT  [1X02]  130.56,40.89 270 top
JP283  LOGO-SFESK  [SFE-LOGO-FLAME]  132.99,34.06 0 top
JP284  FIDUCIAL1X2  [FIDUCIAL-1X2]  131.29,34.77 0 top
JP285  FIDUCIAL1X2  [FIDUCIAL-1X2]  153.42,44.7 0 top
JP286  LOGO-SFENEW  [SFE-NEW-WEBLOGO]  148.65,33.48 0 bottom
JP287  VIN  [1X02]  144.53,40.89 270 top
JP288  JST  [JST-2-SMD]  179.32,39.62 270 top
JP289  VOUT  [1X02]  157.73,40.89 270 top
JP290  LOGO-SFESK  [SFE-LOGO-FLAME]  160.17,34.06 0 top
JP291  FIDUCIAL1X2  [FIDUCIAL-1X2]  158.47,34.77 0 top
JP292  FIDUCIAL1X2  [FIDUCIAL-1X2]  180.59,44.7 0 top
JP293  LOGO-SFENEW  [SFE-NEW-WEBLOGO]  175.82,33.48 0 bottom
JP294  VIN  [1X02]  171.7,40.89 270 top
JP295  JST  [JST-2-SMD]  206.5,39.62 270 top
JP296  VOUT  [1X02]  184.91,40.89 270 top
JP297  LOGO-SFESK  [SFE-LOGO-FLAME]  187.35,34.06 0 top
JP298  FIDUCIAL1X2  [FIDUCIAL-1X2]  185.65,34.77 0 top
JP299  FIDUCIAL1X2  [FIDUCIAL-1X2]  207.77,44.7 0 top
JP300  LOGO-SFENEW  [SFE-NEW-WEBLOGO]  203,33.48 0 bottom
JP301  VIN  [1X02]  198.88,40.89 270 top
JP302  JST  [JST-2-SMD]  233.68,39.62 270 top
JP303  VOUT  [1X02]  212.09,40.89 270 top
JP304  LOGO-SFESK  [SFE-LOGO-FLAME]  214.53,34.06 0 top
JP305  FIDUCIAL1X2  [FIDUCIAL-1X2]  212.83,34.77 0 top
JP306  FIDUCIAL1X2  [FIDUCIAL-1X2]  234.95,44.7 0 top
JP307  LOGO-SFENEW  [SFE-NEW-WEBLOGO]  230.18,33.48 0 bottom
JP308  VIN  [1X02]  226.06,40.89 270 top
JP309  JST  [JST-2-SMD]  152.15,52.83 270 top
JP310  VOUT  [1X02]  130.56,54.1 270 top
JP311  LOGO-SFESK  [SFE-LOGO-FLAME]  132.99,47.27 0 top
JP312  FIDUCIAL1X2  [FIDUCIAL-1X2]  131.29,47.98 0 top
JP313  FIDUCIAL1X2  [FIDUCIAL-1X2]  153.42,57.91 0 top
JP314  LOGO-SFENEW  [SFE-NEW-WEBLOGO]  148.65,46.69 0 bottom
JP315  VIN  [1X02]  144.53,54.1 270 top
JP316  JST  [JST-2-SMD]  179.32,52.83 270 top
JP317  VOUT  [1X02]  157.73,54.1 270 top
JP318  LOGO-SFESK  [SFE-LOGO-FLAME]  160.17,47.27 0 top
JP319  FIDUCIAL1X2  [FIDUCIAL-1X2]  158.47,47.98 0 top
JP320  FIDUCIAL1X2  [FIDUCIAL-1X2]  180.59,57.91 0 top
JP321  LOGO-SFENEW  [SFE-NEW-WEBLOGO]  175.82,46.69 0 bottom
JP322  VIN  [1X02]  171.7,54.1 270 top
JP323  JST  [JST-2-SMD]  206.5,52.83 270 top
JP324  VOUT  [1X02]  184.91,54.1 270 top
JP325  LOGO-SFESK  [SFE-LOGO-FLAME]  187.35,47.27 0 top
JP326  FIDUCIAL1X2  [FIDUCIAL-1X2]  185.65,47.98 0 top
JP327  FIDUCIAL1X2  [FIDUCIAL-1X2]  207.77,57.91 0 top
JP328  LOGO-SFENEW  [SFE-NEW-WEBLOGO]  203,46.69 0 bottom
JP329  VIN  [1X02]  198.88,54.1 270 top
JP330  JST  [JST-2-SMD]  233.68,52.83 270 top
JP331  VOUT  [1X02]  212.09,54.1 270 top
JP332  LOGO-SFESK  [SFE-LOGO-FLAME]  214.53,47.27 0 top
JP333  FIDUCIAL1X2  [FIDUCIAL-1X2]  212.83,47.98 0 top
JP334  FIDUCIAL1X2  [FIDUCIAL-1X2]  234.95,57.91 0 top
JP335  LOGO-SFENEW  [SFE-NEW-WEBLOGO]  230.18,46.69 0 bottom
JP336  VIN  [1X02]  226.06,54.1 270 top
JP337  JST  [JST-2-SMD]  152.15,66.04 270 top
JP338  VOUT  [1X02]  130.56,67.31 270 top
JP339  LOGO-SFESK  [SFE-LOGO-FLAME]  132.99,60.48 0 top
JP340  FIDUCIAL1X2  [FIDUCIAL-1X2]  131.29,61.19 0 top
JP341  FIDUCIAL1X2  [FIDUCIAL-1X2]  153.42,71.12 0 top
JP342  LOGO-SFENEW  [SFE-NEW-WEBLOGO]  148.65,59.9 0 bottom
JP343  VIN  [1X02]  144.53,67.31 270 top
JP344  JST  [JST-2-SMD]  179.32,66.04 270 top
JP345  VOUT  [1X02]  157.73,67.31 270 top
JP346  LOGO-SFESK  [SFE-LOGO-FLAME]  160.17,60.48 0 top
JP347  FIDUCIAL1X2  [FIDUCIAL-1X2]  158.47,61.19 0 top
JP348  FIDUCIAL1X2  [FIDUCIAL-1X2]  180.59,71.12 0 top
JP349  LOGO-SFENEW  [SFE-NEW-WEBLOGO]  175.82,59.9 0 bottom
JP350  VIN  [1X02]  171.7,67.31 270 top
JP351  JST  [JST-2-SMD]  206.5,66.04 270 top
JP352  VOUT  [1X02]  184.91,67.31 270 top
JP353  LOGO-SFESK  [SFE-LOGO-FLAME]  187.35,60.48 0 top
JP354  FIDUCIAL1X2  [FIDUCIAL-1X2]  185.65,61.19 0 top
JP355  FIDUCIAL1X2  [FIDUCIAL-1X2]  207.77,71.12 0 top
JP356  LOGO-SFENEW  [SFE-NEW-WEBLOGO]  203,59.9 0 bottom
JP357  VIN  [1X02]  198.88,67.31 270 top
JP358  JST  [JST-2-SMD]  233.68,66.04 270 top
JP359  VOUT  [1X02]  212.09,67.31 270 top
JP360  LOGO-SFESK  [SFE-LOGO-FLAME]  214.53,60.48 0 top
JP361  FIDUCIAL1X2  [FIDUCIAL-1X2]  212.83,61.19 0 top
JP362  FIDUCIAL1X2  [FIDUCIAL-1X2]  234.95,71.12 0 top
JP363  LOGO-SFENEW  [SFE-NEW-WEBLOGO]  230.18,59.9 0 bottom
JP364  VIN  [1X02]  226.06,67.31 270 top
JP365  JST  [JST-2-SMD]  152.15,79.25 270 top
JP366  VOUT  [1X02]  130.56,80.52 270 top
JP367  LOGO-SFESK  [SFE-LOGO-FLAME]  132.99,73.69 0 top
JP368  FIDUCIAL1X2  [FIDUCIAL-1X2]  131.29,74.4 0 top
JP369  FIDUCIAL1X2  [FIDUCIAL-1X2]  153.42,84.33 0 top
JP370  LOGO-SFENEW  [SFE-NEW-WEBLOGO]  148.65,73.11 0 bottom
JP371  VIN  [1X02]  144.53,80.52 270 top
JP372  JST  [JST-2-SMD]  179.32,79.25 270 top
JP373  VOUT  [1X02]  157.73,80.52 270 top
JP374  LOGO-SFESK  [SFE-LOGO-FLAME]  160.17,73.69 0 top
JP375  FIDUCIAL1X2  [FIDUCIAL-1X2]  158.47,74.4 0 top
JP376  FIDUCIAL1X2  [FIDUCIAL-1X2]  180.59,84.33 0 top
JP377  LOGO-SFENEW  [SFE-NEW-WEBLOGO]  175.82,73.11 0 bottom
JP378  VIN  [1X02]  171.7,80.52 270 top
JP379  JST  [JST-2-SMD]  206.5,79.25 270 top
JP380  VOUT  [1X02]  184.91,80.52 270 top
JP381  LOGO-SFESK  [SFE-LOGO-FLAME]  187.35,73.69 0 top
JP382  FIDUCIAL1X2  [FIDUCIAL-1X2]  185.65,74.4 0 top
JP383  FIDUCIAL1X2  [FIDUCIAL-1X2]  207.77,84.33 0 top
JP384  LOGO-SFENEW  [SFE-NEW-WEBLOGO]  203,73.11 0 bottom
JP385  VIN  [1X02]  198.88,80.52 270 top
JP386  JST  [JST-2-SMD]  233.68,79.25 270 top
JP387  VOUT  [1X02]  212.09,80.52 270 top
JP388  LOGO-SFESK  [SFE-LOGO-FLAME]  214.53,73.69 0 top
JP389  FIDUCIAL1X2  [FIDUCIAL-1X2]  212.83,74.4 0 top
JP390  FIDUCIAL1X2  [FIDUCIAL-1X2]  234.95,84.33 0 top
JP391  LOGO-SFENEW  [SFE-NEW-WEBLOGO]  230.18,73.11 0 bottom
JP392  VIN  [1X02]  226.06,80.52 270 top
JP393  JST  [JST-2-SMD]  152.15,92.46 270 top
JP394  VOUT  [1X02]  130.56,93.73 270 top
JP395  LOGO-SFESK  [SFE-LOGO-FLAME]  132.99,86.89 0 top
JP396  FIDUCIAL1X2  [FIDUCIAL-1X2]  131.29,87.6 0 top
JP397  FIDUCIAL1X2  [FIDUCIAL-1X2]  153.42,97.54 0 top
JP398  LOGO-SFENEW  [SFE-NEW-WEBLOGO]  148.65,86.32 0 bottom
JP399  VIN  [1X02]  144.53,93.73 270 top
JP400  JST  [JST-2-SMD]  179.32,92.46 270 top
JP401  VOUT  [1X02]  157.73,93.73 270 top
JP402  LOGO-SFESK  [SFE-LOGO-FLAME]  160.17,86.89 0 top
JP403  FIDUCIAL1X2  [FIDUCIAL-1X2]  158.47,87.6 0 top
JP404  FIDUCIAL1X2  [FIDUCIAL-1X2]  180.59,97.54 0 top
JP405  LOGO-SFENEW  [SFE-NEW-WEBLOGO]  175.82,86.32 0 bottom
JP406  VIN  [1X02]  171.7,93.73 270 top
JP407  JST  [JST-2-SMD]  206.5,92.46 270 top
JP408  VOUT  [1X02]  184.91,93.73 270 top
JP409  LOGO-SFESK  [SFE-LOGO-FLAME]  187.35,86.89 0 top
JP410  FIDUCIAL1X2  [FIDUCIAL-1X2]  185.65,87.6 0 top
JP411  FIDUCIAL1X2  [FIDUCIAL-1X2]  207.77,97.54 0 top
JP412  LOGO-SFENEW  [SFE-NEW-WEBLOGO]  203,86.32 0 bottom
JP413  VIN  [1X02]  198.88,93.73 270 top
JP414  JST  [JST-2-SMD]  233.68,92.46 270 top
JP415  VOUT  [1X02]  212.09,93.73 270 top
JP416  LOGO-SFESK  [SFE-LOGO-FLAME]  214.53,86.89 0 top
JP417  FIDUCIAL1X2  [FIDUCIAL-1X2]  212.83,87.6 0 top
JP418  FIDUCIAL1X2  [FIDUCIAL-1X2]  234.95,97.54 0 top
JP419  LOGO-SFENEW  [SFE-NEW-WEBLOGO]  230.18,86.32 0 bottom
JP420  VIN  [1X02]  226.06,93.73 270 top
JP421  JST  [JST-2-SMD]  152.15,105.66 270 top
JP422  VOUT  [1X02]  130.56,106.93 270 top
JP423  LOGO-SFESK  [SFE-LOGO-FLAME]  132.99,100.1 0 top
JP424  FIDUCIAL1X2  [FIDUCIAL-1X2]  131.29,100.81 0 top
JP425  FIDUCIAL1X2  [FIDUCIAL-1X2]  153.42,110.74 0 top
JP426  LOGO-SFENEW  [SFE-NEW-WEBLOGO]  148.65,99.52 0 bottom
JP427  VIN  [1X02]  144.53,106.93 270 top
JP428  JST  [JST-2-SMD]  179.32,105.66 270 top
JP429  VOUT  [1X02]  157.73,106.93 270 top
JP430  LOGO-SFESK  [SFE-LOGO-FLAME]  160.17,100.1 0 top
JP431  FIDUCIAL1X2  [FIDUCIAL-1X2]  158.47,100.81 0 top
JP432  FIDUCIAL1X2  [FIDUCIAL-1X2]  180.59,110.74 0 top
JP433  LOGO-SFENEW  [SFE-NEW-WEBLOGO]  175.82,99.52 0 bottom
JP434  VIN  [1X02]  171.7,106.93 270 top
JP435  JST  [JST-2-SMD]  206.5,105.66 270 top
JP436  VOUT  [1X02]  184.91,106.93 270 top
JP437  LOGO-SFESK  [SFE-LOGO-FLAME]  187.35,100.1 0 top
JP438  FIDUCIAL1X2  [FIDUCIAL-1X2]  185.65,100.81 0 top
JP439  FIDUCIAL1X2  [FIDUCIAL-1X2]  207.77,110.74 0 top
JP440  LOGO-SFENEW  [SFE-NEW-WEBLOGO]  203,99.52 0 bottom
JP441  VIN  [1X02]  198.88,106.93 270 top
JP442  JST  [JST-2-SMD]  233.68,105.66 270 top
JP443  VOUT  [1X02]  212.09,106.93 270 top
JP444  LOGO-SFESK  [SFE-LOGO-FLAME]  214.53,100.1 0 top
JP445  FIDUCIAL1X2  [FIDUCIAL-1X2]  212.83,100.81 0 top
JP446  FIDUCIAL1X2  [FIDUCIAL-1X2]  234.95,110.74 0 top
JP447  LOGO-SFENEW  [SFE-NEW-WEBLOGO]  230.18,99.52 0 bottom
JP448  VIN  [1X02]  226.06,106.93 270 top
L1  4.7uH, 1.2A  [CDRH2D09]  16.76,10.03 270 top
L2  4.7uH, 1.2A  [CDRH2D09]  43.94,10.03 270 top
L3  4.7uH, 1.2A  [CDRH2D09]  71.12,10.03 270 top
L4  4.7uH, 1.2A  [CDRH2D09]  98.3,10.03 270 top
L5  4.7uH, 1.2A  [CDRH2D09]  16.76,23.24 270 top
L6  4.7uH, 1.2A  [CDRH2D09]  43.94,23.24 270 top
L7  4.7uH, 1.2A  [CDRH2D09]  71.12,23.24 270 top
L8  4.7uH, 1.2A  [CDRH2D09]  98.3,23.24 270 top
L9  4.7uH, 1.2A  [CDRH2D09]  16.76,36.45 270 top
L10  4.7uH, 1.2A  [CDRH2D09]  43.94,36.45 270 top
L11  4.7uH, 1.2A  [CDRH2D09]  71.12,36.45 270 top
L12  4.7uH, 1.2A  [CDRH2D09]  98.3,36.45 270 top
L13  4.7uH, 1.2A  [CDRH2D09]  16.76,49.66 270 top
L14  4.7uH, 1.2A  [CDRH2D09]  43.94,49.66 270 top
L15  4.7uH, 1.2A  [CDRH2D09]  71.12,49.66 270 top
L16  4.7uH, 1.2A  [CDRH2D09]  98.3,49.66 270 top
L17  4.7uH, 1.2A  [CDRH2D09]  16.76,62.86 270 top
L18  4.7uH, 1.2A  [CDRH2D09]  43.94,62.86 270 top
L19  4.7uH, 1.2A  [CDRH2D09]  71.12,62.86 270 top
L20  4.7uH, 1.2A  [CDRH2D09]  98.3,62.86 270 top
L21  4.7uH, 1.2A  [CDRH2D09]  16.76,76.07 270 top
L22  4.7uH, 1.2A  [CDRH2D09]  43.94,76.07 270 top
L23  4.7uH, 1.2A  [CDRH2D09]  71.12,76.07 270 top
L24  4.7uH, 1.2A  [CDRH2D09]  98.3,76.07 270 top
L25  4.7uH, 1.2A  [CDRH2D09]  16.76,89.28 270 top
L26  4.7uH, 1.2A  [CDRH2D09]  43.94,89.28 270 top
L27  4.7uH, 1.2A  [CDRH2D09]  71.12,89.28 270 top
L28  4.7uH, 1.2A  [CDRH2D09]  98.3,89.28 270 top
L29  4.7uH, 1.2A  [CDRH2D09]  16.76,102.49 270 top
L30  4.7uH, 1.2A  [CDRH2D09]  43.94,102.49 270 top
L31  4.7uH, 1.2A  [CDRH2D09]  71.12,102.49 270 top
L32  4.7uH, 1.2A  [CDRH2D09]  98.3,102.49 270 top
L33  4.7uH, 1.2A  [CDRH2D09]  139.19,10.03 270 top
L34  4.7uH, 1.2A  [CDRH2D09]  166.37,10.03 270 top
L35  4.7uH, 1.2A  [CDRH2D09]  193.55,10.03 270 top
L36  4.7uH, 1.2A  [CDRH2D09]  220.73,10.03 270 top
L37  4.7uH, 1.2A  [CDRH2D09]  139.19,23.24 270 top
L38  4.7uH, 1.2A  [CDRH2D09]  166.37,23.24 270 top
L39  4.7uH, 1.2A  [CDRH2D09]  193.55,23.24 270 top
L40  4.7uH, 1.2A  [CDRH2D09]  220.73,23.24 270 top
L41  4.7uH, 1.2A  [CDRH2D09]  139.19,36.45 270 top
L42  4.7uH, 1.2A  [CDRH2D09]  166.37,36.45 270 top
L43  4.7uH, 1.2A  [CDRH2D09]  193.55,36.45 270 top
L44  4.7uH, 1.2A  [CDRH2D09]  220.73,36.45 270 top
L45  4.7uH, 1.2A  [CDRH2D09]  139.19,49.66 270 top
L46  4.7uH, 1.2A  [CDRH2D09]  166.37,49.66 270 top
L47  4.7uH, 1.2A  [CDRH2D09]  193.55,49.66 270 top
L48  4.7uH, 1.2A  [CDRH2D09]  220.73,49.66 270 top
L49  4.7uH, 1.2A  [CDRH2D09]  139.19,62.86 270 top
L50  4.7uH, 1.2A  [CDRH2D09]  166.37,62.86 270 top
L51  4.7uH, 1.2A  [CDRH2D09]  193.55,62.86 270 top
L52  4.7uH, 1.2A  [CDRH2D09]  220.73,62.86 270 top
L53  4.7uH, 1.2A  [CDRH2D09]  139.19,76.07 270 top
L54  4.7uH, 1.2A  [CDRH2D09]  166.37,76.07 270 top
L55  4.7uH, 1.2A  [CDRH2D09]  193.55,76.07 270 top
L56  4.7uH, 1.2A  [CDRH2D09]  220.73,76.07 270 top
L57  4.7uH, 1.2A  [CDRH2D09]  139.19,89.28 270 top
L58  4.7uH, 1.2A  [CDRH2D09]  166.37,89.28 270 top
L59  4.7uH, 1.2A  [CDRH2D09]  193.55,89.28 270 top
L60  4.7uH, 1.2A  [CDRH2D09]  220.73,89.28 270 top
L61  4.7uH, 1.2A  [CDRH2D09]  139.19,102.49 270 top
L62  4.7uH, 1.2A  [CDRH2D09]  166.37,102.49 270 top
L63  4.7uH, 1.2A  [CDRH2D09]  193.55,102.49 270 top
L64  4.7uH, 1.2A  [CDRH2D09]  220.73,102.49 270 top
R1  2M  [0603-RES]  51.61,17.63 270 top
R2  220k  [0603-RES]  46.74,18.39 0 top
R3  2M  [0603-RES]  24.43,17.63 270 top
R4  220k  [0603-RES]  19.56,18.39 0 top
R5  1.2M  [0603-RES]  7.77,17.45 90 top
R6  220k  [0603-RES]  15.77,18.41 180 top
R7  2M  [0603-RES]  10.54,17.83 180 top
R8  1.2M  [0603-RES]  34.95,17.45 90 top
R9  220k  [0603-RES]  42.95,18.41 180 top
R10  2M  [0603-RES]  37.72,17.83 180 top
R11  2M  [0603-RES]  78.79,17.63 270 top
R12  220k  [0603-RES]  73.91,18.39 0 top
R13  1.2M  [0603-RES]  62.13,17.45 90 top
R14  220k  [0603-RES]  70.13,18.41 180 top
R15  2M  [0603-RES]  64.9,17.83 180 top
R16  2M  [0603-RES]  105.97,17.63 270 top
R17  220k  [0603-RES]  101.09,18.39 0 top
R18  1.2M  [0603-RES]  89.31,17.45 90 top
R19  220k  [0603-RES]  97.31,18.41 180 top
R20  2M  [0603-RES]  92.08,17.83 180 top
R21  2M  [0603-RES]  24.43,30.84 270 top
R22  220k  [0603-RES]  19.56,31.6 0 top
R23  1.2M  [0603-RES]  7.77,30.66 90 top
R24  220k  [0603-RES]  15.77,31.62 180 top
R25  2M  [0603-RES]  10.54,31.04 180 top
R26  2M  [0603-RES]  51.61,30.84 270 top
R27  220k  [0603-RES]  46.74,31.6 0 top
R28  1.2M  [0603-RES]  34.95,30.66 90 top
R29  220k  [0603-RES]  42.95,31.62 180 top
R30  2M  [0603-RES]  37.72,31.04 180 top
R31  2M  [0603-RES]  78.79,30.84 270 top
R32  220k  [0603-RES]  73.91,31.6 0 top
R33  1.2M  [0603-RES]  62.13,30.66 90 top
R34  220k  [0603-RES]  70.13,31.62 180 top
R35  2M  [0603-RES]  64.9,31.04 180 top
R36  2M  [0603-RES]  105.97,30.84 270 top
R37  220k  [0603-RES]  101.09,31.6 0 top
R38  1.2M  [0603-RES]  89.31,30.66 90 top
R39  220k  [0603-RES]  97.31,31.62 180 top
R40  2M  [0603-RES]  92.08,31.04 180 top
R41  2M  [0603-RES]  24.43,44.04 270 top
R42  220k  [0603-RES]  19.56,44.81 0 top
R43  1.2M  [0603-RES]  7.77,43.87 90 top
R44  220k  [0603-RES]  15.77,44.83 180 top
R45  2M  [0603-RES]  10.54,44.25 180 top
R46  2M  [0603-RES]  51.61,44.04 270 top
R47  220k  [0603-RES]  46.74,44.81 0 top
R48  1.2M  [0603-RES]  34.95,43.87 90 top
R49  220k  [0603-RES]  42.95,44.83 180 top
R50  2M  [0603-RES]  37.72,44.25 180 top
R51  2M  [0603-RES]  78.79,44.04 270 top
R52  220k  [0603-RES]  73.91,44.81 0 top
R53  1.2M  [0603-RES]  62.13,43.87 90 top
R54  220k  [0603-RES]  70.13,44.83 180 top
R55  2M  [0603-RES]  64.9,44.25 180 top
R56  2M  [0603-RES]  105.97,44.04 270 top
R57  220k  [0603-RES]  101.09,44.81 0 top
R58  1.2M  [0603-RES]  89.31,43.87 90 top
R59  220k  [0603-RES]  97.31,44.83 180 top
R60  2M  [0603-RES]  92.08,44.25 180 top
R61  2M  [0603-RES]  24.43,57.25 270 top
R62  220k  [0603-RES]  19.56,58.01 0 top
R63  1.2M  [0603-RES]  7.77,57.07 90 top
R64  220k  [0603-RES]  15.77,58.04 180 top
R65  2M  [0603-RES]  10.54,57.45 180 top
R66  2M  [0603-RES]  51.61,57.25 270 top
R67  220k  [0603-RES]  46.74,58.01 0 top
R68  1.2M  [0603-RES]  34.95,57.07 90 top
R69  220k  [0603-RES]  42.95,58.04 180 top
R70  2M  [0603-RES]  37.72,57.45 180 top
R71  2M  [0603-RES]  78.79,57.25 270 top
R72  220k  [0603-RES]  73.91,58.01 0 top
R73  1.2M  [0603-RES]  62.13,57.07 90 top
R74  220k  [0603-RES]  70.13,58.04 180 top
R75  2M  [0603-RES]  64.9,57.45 180 top
R76  2M  [0603-RES]  105.97,57.25 270 top
R77  220k  [0603-RES]  101.09,58.01 0 top
R78  1.2M  [0603-RES]  89.31,57.07 90 top
R79  220k  [0603-RES]  97.31,58.04 180 top
R80  2M  [0603-RES]  92.08,57.45 180 top
R81  2M  [0603-RES]  24.43,70.46 270 top
R82  220k  [0603-RES]  19.56,71.22 0 top
R83  1.2M  [0603-RES]  7.77,70.28 90 top
R84  220k  [0603-RES]  15.77,71.25 180 top
R85  2M  [0603-RES]  10.54,70.66 180 top
R86  2M  [0603-RES]  51.61,70.46 270 top
R87  220k  [0603-RES]  46.74,71.22 0 top
R88  1.2M  [0603-RES]  34.95,70.28 90 top
R89  220k  [0603-RES]  42.95,71.25 180 top
R90  2M  [0603-RES]  37.72,70.66 180 top
R91  2M  [0603-RES]  78.79,70.46 270 top
R92  220k  [0603-RES]  73.91,71.22 0 top
R93  1.2M  [0603-RES]  62.13,70.28 90 top
R94  220k  [0603-RES]  70.13,71.25 180 top
R95  2M  [0603-RES]  64.9,70.66 180 top
R96  2M  [0603-RES]  105.97,70.46 270 top
R97  220k  [0603-RES]  101.09,71.22 0 top
R98  1.2M  [0603-RES]  89.31,70.28 90 top
R99  220k  [0603-RES]  97.31,71.25 180 top
R100  2M  [0603-RES]  92.08,70.66 180 top
R101  2M  [0603-RES]  24.43,83.67 270 top
R102  220k  [0603-RES]  19.56,84.43 0 top
R103  1.2M  [0603-RES]  7.77,83.49 90 top
R104  220k  [0603-RES]  15.77,84.45 180 top
R105  2M  [0603-RES]  10.54,83.87 180 top
R106  2M  [0603-RES]  51.61,83.67 270 top
R107  220k  [0603-RES]  46.74,84.43 0 top
R108  1.2M  [0603-RES]  34.95,83.49 90 top
R109  220k  [0603-RES]  42.95,84.45 180 top
R110  2M  [0603-RES]  37.72,83.87 180 top
R111  2M  [0603-RES]  78.79,83.67 270 top
R112  220k  [0603-RES]  73.91,84.43 0 top
R113  1.2M  [0603-RES]  62.13,83.49 90 top
R114  220k  [0603-RES]  70.13,84.45 180 top
R115  2M  [0603-RES]  64.9,83.87 180 top
R116  2M  [0603-RES]  105.97,83.67 270 top
R117  220k  [0603-RES]  101.09,84.43 0 top
R118  1.2M  [0603-RES]  89.31,83.49 90 top
R119  220k  [0603-RES]  97.31,84.45 180 top
R120  2M  [0603-RES]  92.08,83.87 180 top
R121  2M  [0603-RES]  24.43,96.88 270 top
R122  220k  [0603-RES]  19.56,97.64 0 top
R123  1.2M  [0603-RES]  7.77,96.7 90 top
R124  220k  [0603-RES]  15.77,97.66 180 top
R125  2M  [0603-RES]  10.54,97.08 180 top
R126  2M  [0603-RES]  51.61,96.88 270 top
R127  220k  [0603-RES]  46.74,97.64 0 top
R128  1.2M  [0603-RES]  34.95,96.7 90 top
R129  220k  [0603-RES]  42.95,97.66 180 top
R130  2M  [0603-RES]  37.72,97.08 180 top
R131  2M  [0603-RES]  78.79,96.88 270 top
R132  220k  [0603-RES]  73.91,97.64 0 top
R133  1.2M  [0603-RES]  62.13,96.7 90 top
R134  220k  [0603-RES]  70.13,97.66 180 top
R135  2M  [0603-RES]  64.9,97.08 180 top
R136  2M  [0603-RES]  105.97,96.88 270 top
R137  220k  [0603-RES]  101.09,97.64 0 top
R138  1.2M  [0603-RES]  89.31,96.7 90 top
R139  220k  [0603-RES]  97.31,97.66 180 top
R140  2M  [0603-RES]  92.08,97.08 180 top
R141  2M  [0603-RES]  24.43,110.08 270 top
R142  220k  [0603-RES]  19.56,110.85 0 top
R143  1.2M  [0603-RES]  7.77,109.91 90 top
R144  220k  [0603-RES]  15.77,110.87 180 top
R145  2M  [0603-RES]  10.54,110.29 180 top
R146  2M  [0603-RES]  51.61,110.08 270 top
R147  220k  [0603-RES]  46.74,110.85 0 top
R148  1.2M  [0603-RES]  34.95,109.91 90 top
R149  220k  [0603-RES]  42.95,110.87 180 top
R150  2M  [0603-RES]  37.72,110.29 180 top
R151  2M  [0603-RES]  78.79,110.08 270 top
R152  220k  [0603-RES]  73.91,110.85 0 top
R153  1.2M  [0603-RES]  62.13,109.91 90 top
R154  220k  [0603-RES]  70.13,110.87 180 top
R155  2M  [0603-RES]  64.9,110.29 180 top
R156  2M  [0603-RES]  105.97,110.08 270 top
R157  220k  [0603-RES]  101.09,110.85 0 top
R158  1.2M  [0603-RES]  89.31,109.91 90 top
R159  220k  [0603-RES]  97.31,110.87 180 top
R160  2M  [0603-RES]  92.08,110.29 180 top
R161  2M  [0603-RES]  146.86,17.63 270 top
R162  220k  [0603-RES]  141.99,18.39 0 top
R163  1.2M  [0603-RES]  130.2,17.45 90 top
R164  220k  [0603-RES]  138.2,18.41 180 top
R165  2M  [0603-RES]  132.97,17.83 180 top
R166  2M  [0603-RES]  174.04,17.63 270 top
R167  220k  [0603-RES]  169.16,18.39 0 top
R168  1.2M  [0603-RES]  157.38,17.45 90 top
R169  220k  [0603-RES]  165.38,18.41 180 top
R170  2M  [0603-RES]  160.15,17.83 180 top
R171  2M  [0603-RES]  201.22,17.63 270 top
R172  220k  [0603-RES]  196.34,18.39 0 top
R173  1.2M  [0603-RES]  184.56,17.45 90 top
R174  220k  [0603-RES]  192.56,18.41 180 top
R175  2M  [0603-RES]  187.33,17.83 180 top
R176  2M  [0603-RES]  228.4,17.63 270 top
R177  220k  [0603-RES]  223.52,18.39 0 top
R178  1.2M  [0603-RES]  211.73,17.45 90 top
R179  220k  [0603-RES]  219.74,18.41 180 top
R180  2M  [0603-RES]  214.5,17.83 180 top
R181  2M  [0603-RES]  146.86,30.84 270 top
R182  220k  [0603-RES]  141.99,31.6 0 top
R183  1.2M  [0603-RES]  130.2,30.66 90 top
R184  220k  [0603-RES]  138.2,31.62 180 top
R185  2M  [0603-RES]  132.97,31.04 180 top
R186  2M  [0603-RES]  174.04,30.84 270 top
R187  220k  [0603-RES]  169.16,31.6 0 top
R188  1.2M  [0603-RES]  157.38,30.66 90 top
R189  220k  [0603-RES]  165.38,31.62 180 top
R190  2M  [0603-RES]  160.15,31.04 180 top
R191  2M  [0603-RES]  201.22,30.84 270 top
R192  220k  [0603-RES]  196.34,31.6 0 top
R193  1.2M  [0603-RES]  184.56,30.66 90 top
R194  220k  [0603-RES]  192.56,31.62 180 top
R195  2M  [0603-RES]  187.33,31.04 180 top
R196  2M  [0603-RES]  228.4,30.84 270 top
R197  220k  [0603-RES]  223.52,31.6 0 top
R198  1.2M  [0603-RES]  211.73,30.66 90 top
R199  220k  [0603-RES]  219.74,31.62 180 top
R200  2M  [0603-RES]  214.5,31.04 180 top
R201  2M  [0603-RES]  146.86,44.04 270 top
R202  220k  [0603-RES]  141.99,44.81 0 top
R203  1.2M  [0603-RES]  130.2,43.87 90 top
R204  220k  [0603-RES]  138.2,44.83 180 top
R205  2M  [0603-RES]  132.97,44.25 180 top
R206  2M  [0603-RES]  174.04,44.04 270 top
R207  220k  [0603-RES]  169.16,44.81 0 top
R208  1.2M  [0603-RES]  157.38,43.87 90 top
R209  220k  [0603-RES]  165.38,44.83 180 top
R210  2M  [0603-RES]  160.15,44.25 180 top
R211  2M  [0603-RES]  201.22,44.04 270 top
R212  220k  [0603-RES]  196.34,44.81 0 top
R213  1.2M  [0603-RES]  184.56,43.87 90 top
R214  220k  [0603-RES]  192.56,44.83 180 top
R215  2M  [0603-RES]  187.33,44.25 180 top
R216  2M  [0603-RES]  228.4,44.04 270 top
R217  220k  [0603-RES]  223.52,44.81 0 top
R218  1.2M  [0603-RES]  211.73,43.87 90 top
R219  220k  [0603-RES]  219.74,44.83 180 top
R220  2M  [0603-RES]  214.5,44.25 180 top
R221  2M  [0603-RES]  146.86,57.25 270 top
R222  220k  [0603-RES]  141.99,58.01 0 top
R223  1.2M  [0603-RES]  130.2,57.07 90 top
R224  220k  [0603-RES]  138.2,58.04 180 top
R225  2M  [0603-RES]  132.97,57.45 180 top
R226  2M  [0603-RES]  174.04,57.25 270 top
R227  220k  [0603-RES]  169.16,58.01 0 top
R228  1.2M  [0603-RES]  157.38,57.07 90 top
R229  220k  [0603-RES]  165.38,58.04 180 top
R230  2M  [0603-RES]  160.15,57.45 180 top
R231  2M  [0603-RES]  201.22,57.25 270 top
R232  220k  [0603-RES]  196.34,58.01 0 top
R233  1.2M  [0603-RES]  184.56,57.07 90 top
R234  220k  [0603-RES]  192.56,58.04 180 top
R235  2M  [0603-RES]  187.33,57.45 180 top
R236  2M  [0603-RES]  228.4,57.25 270 top
R237  220k  [0603-RES]  223.52,58.01 0 top
R238  1.2M  [0603-RES]  211.73,57.07 90 top
R239  220k  [0603-RES]  219.74,58.04 180 top
R240  2M  [0603-RES]  214.5,57.45 180 top
R241  2M  [0603-RES]  146.86,70.46 270 top
R242  220k  [0603-RES]  141.99,71.22 0 top
R243  1.2M  [0603-RES]  130.2,70.28 90 top
R244  220k  [0603-RES]  138.2,71.25 180 top
R245  2M  [0603-RES]  132.97,70.66 180 top
R246  2M  [0603-RES]  174.04,70.46 270 top
R247  220k  [0603-RES]  169.16,71.22 0 top
R248  1.2M  [0603-RES]  157.38,70.28 90 top
R249  220k  [0603-RES]  165.38,71.25 180 top
R250  2M  [0603-RES]  160.15,70.66 180 top
R251  2M  [0603-RES]  201.22,70.46 270 top
R252  220k  [0603-RES]  196.34,71.22 0 top
R253  1.2M  [0603-RES]  184.56,70.28 90 top
R254  220k  [0603-RES]  192.56,71.25 180 top
R255  2M  [0603-RES]  187.33,70.66 180 top
R256  2M  [0603-RES]  228.4,70.46 270 top
R257  220k  [0603-RES]  223.52,71.22 0 top
R258  1.2M  [0603-RES]  211.73,70.28 90 top
R259  220k  [0603-RES]  219.74,71.25 180 top
R260  2M  [0603-RES]  214.5,70.66 180 top
R261  2M  [0603-RES]  146.86,83.67 270 top
R262  220k  [0603-RES]  141.99,84.43 0 top
R263  1.2M  [0603-RES]  130.2,83.49 90 top
R264  220k  [0603-RES]  138.2,84.45 180 top
R265  2M  [0603-RES]  132.97,83.87 180 top
R266  2M  [0603-RES]  174.04,83.67 270 top
R267  220k  [0603-RES]  169.16,84.43 0 top
R268  1.2M  [0603-RES]  157.38,83.49 90 top
R269  220k  [0603-RES]  165.38,84.45 180 top
R270  2M  [0603-RES]  160.15,83.87 180 top
R271  2M  [0603-RES]  201.22,83.67 270 top
R272  220k  [0603-RES]  196.34,84.43 0 top
R273  1.2M  [0603-RES]  184.56,83.49 90 top
R274  220k  [0603-RES]  192.56,84.45 180 top